# Altium PCB Zegar_PCB.PcbDoc
Units mm, origin at the board's own origin, x right, y up, seen from the top; angles counter-clockwise.
Board outline 96.52 x 64.52 mm, 2 copper layers (Top Layer, Bottom Layer), stack 1.671 mm thick; 24 components, 36 nets, 112 pads, 5 vias.
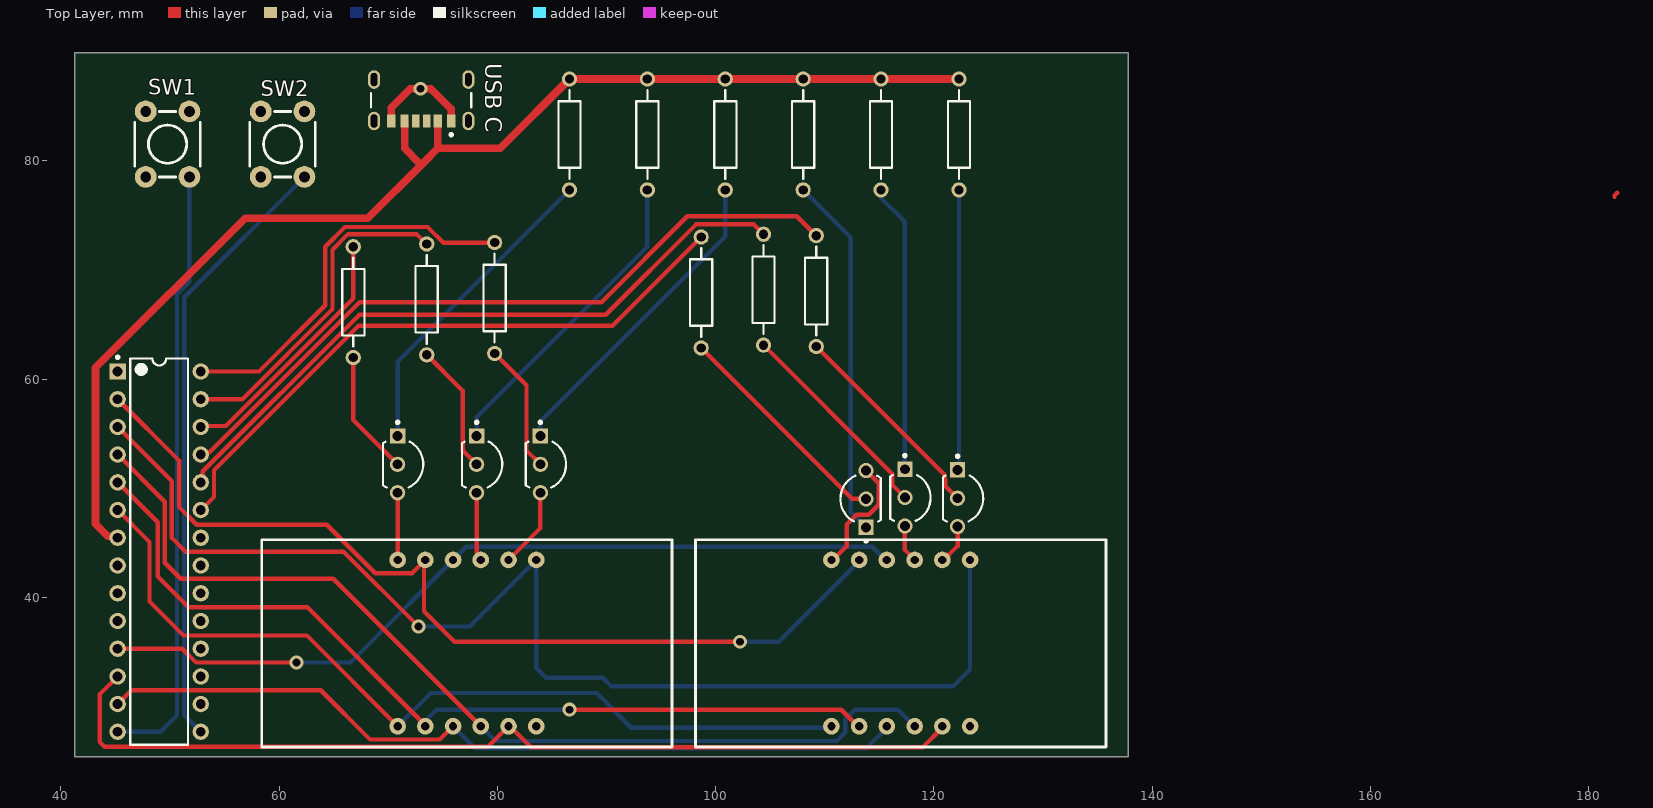
[diagram p0: Top Layer view]
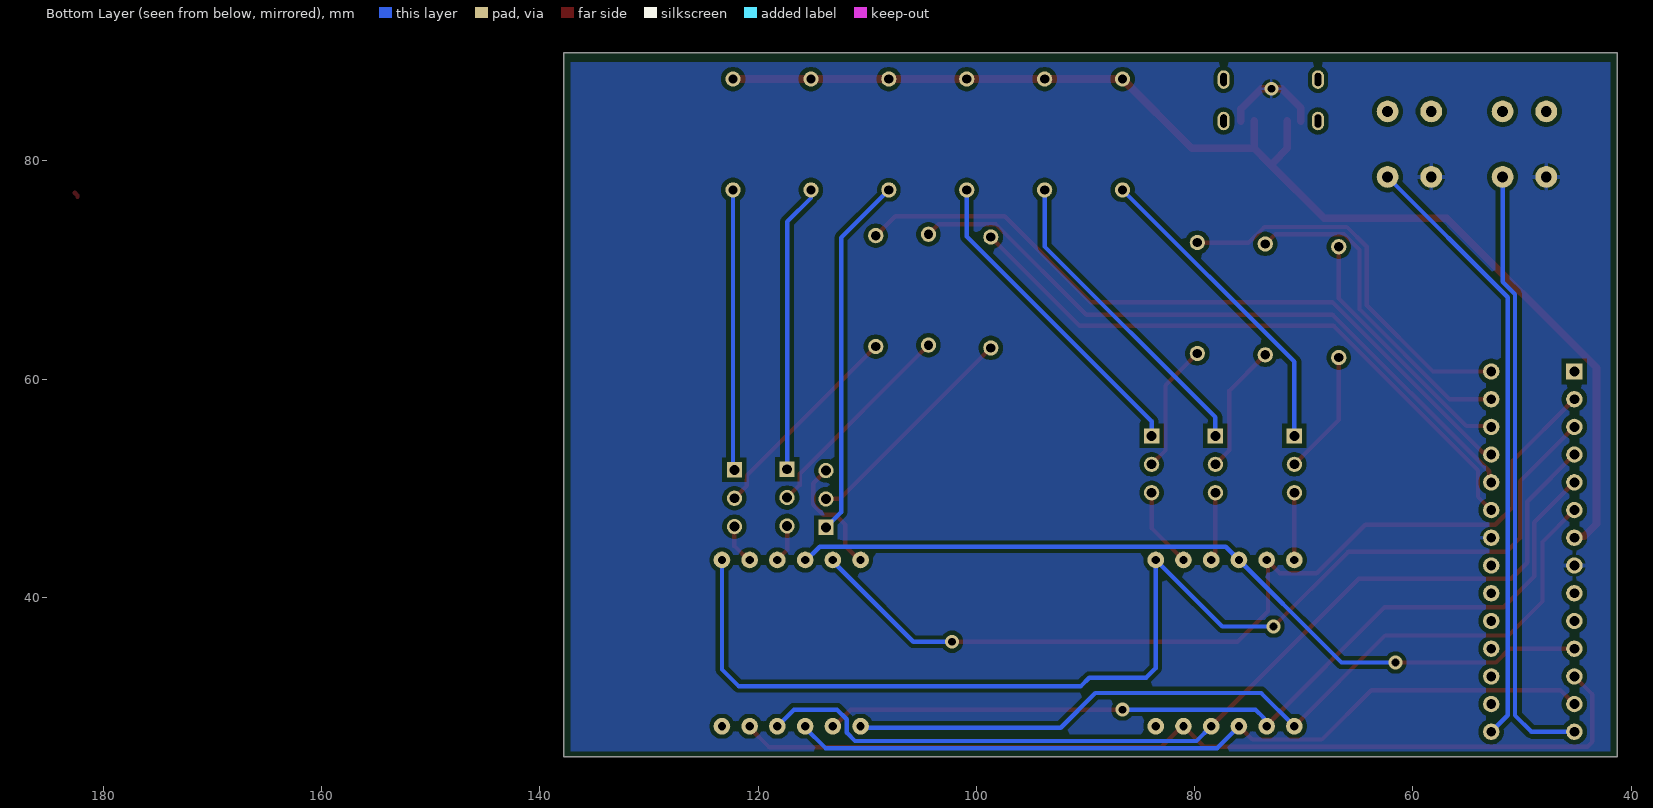
[diagram p1: Bottom Layer view, seen from below]

## Layer stack, top to bottom
Top Solder: solder mask 0.0102, Solder Resist, Dk 3.5
Top Layer: signal copper 0.0356
Dielectric 1: dielectric 1.6, FR-4, Dk 4.8
Bottom Layer: signal copper 0.0356
Bottom Solder: solder mask 0.0102, Solder Resist, Dk 3.5

## Board outline
41.275,25.4 41.275,89.916 137.795,89.916 137.795,25.4

## Design rules (kind name [scope] priority, off if disabled: settings)
Clearance [All] p1: gap=0.254 ignorepadtopadclearanceinfootprint=FALSE
PolygonConnect PolygonConnect_4 [All vs IsNamedPolygon('NONET_L-01_P-001')] p1: thpad.connectstyle=Relief thpad.reliefconductorwidth=0.4 thpad.reliefentries=4 thpad.polygonreliefangle="90 Angle" thpad.airgapwidth=0.254 smdpad.connectstyle=Relief smdpad.reliefconductorwidth=0.254 smdpad.reliefentries=4 smdpad.polygonreliefangle="90 Angle" smdpad.airgapwidth=0.254 via.connectstyle=Relief via.reliefconductorwidth=0.254 via.reliefentries=4 via.polygonreliefangle="90 Angle" via.airgapwidth=0.254
PolygonConnect PolygonConnect_3 [All vs IsNamedPolygon('NONET_L-01_P-001')] p2: thpad.connectstyle=Relief thpad.reliefconductorwidth=0.254 thpad.reliefentries=4 thpad.polygonreliefangle="90 Angle" thpad.airgapwidth=0.254 smdpad.connectstyle=Relief smdpad.reliefconductorwidth=0.254 smdpad.reliefentries=4 smdpad.polygonreliefangle="90 Angle" smdpad.airgapwidth=0.254 via.connectstyle=Relief via.reliefconductorwidth=0.4 via.reliefentries=4 via.polygonreliefangle="90 Angle" via.airgapwidth=0.4
PolygonConnect PolygonConnect_2 [All vs IsNamedPolygon('NONET_L-01_P-001')] p3: thpad.connectstyle=Relief thpad.reliefconductorwidth=0.254 thpad.reliefentries=4 thpad.polygonreliefangle="90 Angle" thpad.airgapwidth=0.254 smdpad.connectstyle=Relief smdpad.reliefconductorwidth=0.254 smdpad.reliefentries=4 smdpad.polygonreliefangle="90 Angle" smdpad.airgapwidth=0.254 via.connectstyle=Relief via.reliefconductorwidth=0.254 via.reliefentries=4 via.polygonreliefangle="90 Angle" via.airgapwidth=0.4
PolygonConnect PolygonConnect_1 [All vs IsNamedPolygon('GND_L02_P001')] p4: thpad.connectstyle=Relief thpad.reliefconductorwidth=0.254 thpad.reliefentries=4 thpad.polygonreliefangle="90 Angle" thpad.airgapwidth=0.254 smdpad.connectstyle=Relief smdpad.reliefconductorwidth=0.254 smdpad.reliefentries=4 smdpad.polygonreliefangle="90 Angle" smdpad.airgapwidth=0.254 via.connectstyle=Relief via.reliefconductorwidth=0.4 via.reliefentries=4 via.polygonreliefangle="90 Angle" via.airgapwidth=0.254
PolygonConnect [All] p5: connectstyle=Relief reliefconductorwidth=0.254 reliefentries=4 polygonreliefangle="90 Angle" airgapwidth=0.254
RoutingVias [All] p1: holewidth=0.711 width=1.27 viastyle="Through Hole" minholewidth=0.711 minwidth=1.27 maxholewidth=0.711 maxwidth=1.27
SolderMaskExpansion [All] p1: expansion=0.102 istentingtop=FALSE
SupplyNets "Schematic Supply Nets" [InNet('GND')] p1: voltage=0.000
Width [All] p1: maxlimit=1 minlimit=0.4 preferedwidth=0.4
30 further rules are at their usual default settings.

## Classes and differential pairs
component class Zegar_schemmatic: SW1 SW2 "USB C"

## Components (designator, comment, footprint, x,y, rotation, side; value= is the part's Value field where it differs from the comment)
R1 "RES_AX_1/4W_4M" AX_1/4W_4M 108.026,77.343 r90 top value=1K
R2 "RES_AX_1/4W_4M" AX_1/4W_4M 115.164,77.343 r90 top value=1K
R3 "RES_AX_1/4W_4M" AX_1/4W_4M 122.301,77.343 r90 top value=1K
R4 "RES_AX_1/4W_4M" AX_1/4W_4M 86.614,77.343 r90 top value=1K
R5 "RES_AX_1/4W_4M" AX_1/4W_4M 93.751,77.343 r90 top value=1K
R6 "RES_AX_1/4W_4M" AX_1/4W_4M 100.889,77.343 r90 top value=1K
RT1 "RES_AX_1/4W_4M" AX_1/4W_4M 98.679,62.865 r90 top value=33K
RT2 "RES_AX_1/4W_4M" AX_1/4W_4M 104.394,63.119 r90 top value=33K
RT3 "RES_AX_1/4W_4M" AX_1/4W_4M 109.22,62.992 r90 top value=33K
RT4 "RES_AX_1/4W_4M" AX_1/4W_4M 66.802,61.976 r90 top value=33K
RT5 "RES_AX_1/4W_4M" AX_1/4W_4M 73.533,62.23 r90 top value=33K
RT6 "RES_AX_1/4W_4M" AX_1/4W_4M 79.756,62.357 r90 top value=33K
SW1 "SWITCH_SQ_6m_4X6m" SQ_6m_4X6m 49.784,81.534 r0 top
SW2 "SWITCH_SQ_6m_4X6m" SQ_6m_4X6m 60.325,81.534 r0 top
T1 "BC548" TO-92W 113.792,46.422 r90 top
T2 "BC548" TO-92W 117.348,51.749 r270 top
T3 "BC548" TO-92W 122.174,51.689 r270 top
T4 "BC548" TO-92W 70.866,54.797 r270 top
T5 "BC548" TO-92W 78.105,54.797 r270 top
T6 "BC548" TO-92W 83.947,54.797 r270 top
U? "ATmega8L-8PU" 28P3 49.022,44.196 r0 top
"USB C" "USB4125-GF-A-0190" FP-USB4125-GF-A-0190-MFG 73.025,86.655 r180 top
W1 "Wyświetlacz LED" PCBComponent_1 70.866,28.194 r0 top
W2 "Wyświetlacz LED" PCBComponent_1 110.617,28.194 r0 top

## Footprints (in the part's own frame and the unit in brackets; to place one, negate y for a bottom-side part, rotate by r counter-clockwise, add the part's x,y. Pads: shape width x height; smd on the part's side, far side on the other; paste and mask are expansions set on the pad)
28P3 [mm] "28-Pin Plastic Dual In-Line Package (PDIP)"
  rect 1.5x1.5 hole 0.9: 1(-3.81,16.51)
  round 1.5 hole 0.9: 2(-3.81,13.97) 3(-3.81,11.43) 4(-3.81,8.89) 5(-3.81,6.35) 6(-3.81,3.81) 7(-3.81,1.27) 8(-3.81,-1.27) 9(-3.81,-3.81) 10(-3.81,-6.35) 11(-3.81,-8.89) 12(-3.81,-11.43) 13(-3.81,-13.97) 14(-3.81,-16.51) 15(3.81,-16.51) 16(3.81,-13.97) 17(3.81,-11.43) 18(3.81,-8.89) 19(3.81,-6.35) 20(3.81,-3.81) 21(3.81,-1.27) 22(3.81,1.27) 23(3.81,3.81) 24(3.81,6.35) 25(3.81,8.89) 26(3.81,11.43) 27(3.81,13.97) 28(3.81,16.51)
  silkscreen extent -3.93,-17.7 2.65,17.93, body extent -3.6,-17.65 3.6,17.65, height 4.58
AX_1/4W_4M [mm] "Axial Device, Thru-Hole; 2 Leads; 0.4 in Pin Spacing"
  round 1.4 hole 0.85: 1(0,0) 2(10.16,0)
  silkscreen extent 1.02,-1.02 9.14,1.02
FP-USB4125-GF-A-0190-MFG [mm]
  rrect100% 1.1x1.7 hole 1.2 slot 0.6 at 0 deg paste-2539.97 mask+0: 1(-4.32,3) 2(4.32,3) 3(-4.32,-0.8) 4(4.32,-0.8)
  rect 0.7x1.2 smd paste+0 mask+0: A5(-0.5,3) B5(0.5,3)
  rect 0.76x1.2 smd paste+0 mask+0: A9(1.52,3) B9(-1.52,3)
  rect 0.8x1.2 smd paste+0 mask+0: A12(2.75,3) B12(-2.75,3)
  silkscreen extent -4.59,0.43 4.59,4.37, body extent -4.97,-3.57 4.97,3.95, height 0.25
PCBComponent_1 [mil]
  round 60 hole 30: 1(0,0) 2(100,0) 3(200,0) 4(300,0) 5(400,0) 6(500,0) 7(500,600) 8(400,600) 9(300,600) 10(200,600) 11(100,600) 12(0,600)
  silkscreen extent -490,-75 990,673
SQ_6m_4X6m [mm]
  round 2 hole 1 paste-2539.97: 1(-2,3) 2(-2,-3) 3(2,-3) 4(2,3)
  silkscreen extent -3,-3 3,3
TO-92W [mm] "TO, 3-Leads, Body Dia 4.7mm, Pitch 2.6mm"
  rect 1.4x1.4 hole 0.9: 1(0,0)
  round 1.4 hole 0.9: 2(2.6,0) 3(5.2,0)
  silkscreen extent -1.37,-1.34 4.73,2.35, body extent -0.24,-1.34 5.44,2.35, height 5.33

## Part data
R1 R2 R3 R4 R5 R6 RT1 RT2 RT3 RT4 RT5 RT6: "Resistor", LatestRevisionDate=17-Jul-2002, LatestRevisionNote="Re-released for DXP Platform.", PackageDescription="Axial Device, Thru-Hole; 2 Leads; 0.4 in Pin Spacing", PackageReference=AXIAL-0.4, Published=8-Jun-2000, Publisher="Altium Limited"
SW1 SW2: Contact Current Rating=50mA, Voltage Rating=12V, Actuator Length=1.5mm, Current Rating=50mA, Height=4mm, Mount="Through Hole", Switch Function=Off-Mom
T1 T2 T3 T4 T5 T6: "Amplifier Transistor, NPN Silicon, 3-Pin TO-92, Bulk Box", Manufacturer="On Semiconductor", PartNumber=BC548B, ComponentLink1Description="Manufacturer URL", ComponentLink1URL=http://www.onsemi.com/, ComponentLink2Description=Datasheet, ComponentLink2URL=http://www.onsemi.com/pub_link/Collateral/BC546-D.PDF, ComponentLink3Description="Package Specification", ComponentLink3URL=http://www.onsemi.cn/pub_link/Collateral/2N6426-D.PDF, DatasheetVersion="Rev. 7", fT Min (MHz)=150, IC Continuous (A)=0.1, Mounting Technology="Through Hole", PackageDescription="3-Pin Transistor Outline, Body 4.825 x 3.685 mm, Pitch 1.27 mm", PackageReference=TO-92-3-29-11_AM_SL, PackageVersion="Rev. AM", Packing="Bulk Box", Polarity=NPN, RoHS=FALSE
U?: library part CMP-0095-00374-1, "8-bit AVR Microcontroller, 2.7-5.5V, 8MHz, 8KB Flash, 512 Bytes EEPROM, 1KB SRAM, 28-pin PDIP, Industrial Grade (-40°C to 85°C)", ComponentLink1Description="Manufacturer URL", ComponentLink1URL=http://www.atmel.com/, ComponentLink2Description=ATmega8(L), ComponentLink2URL=http://www.atmel.com/dyn/resources/prod_documents/doc2486.pdf, ComponentLink3Description="ATmega8(L) Summary", ComponentLink3URL=http://www.atmel.com/dyn/resources/prod_documents/2486S.pdf, DatasheetVersion="revZ, Feb-2011", PackageDescription="28-lead (0.300\"/7.62mm Wide) Plastic Dual Inline Package (PDIP)", PackageReference=28P3, PackageVersion="revB, Sep-2001"
"USB C": library part CMP-245163-000004-1, "CONN RCPT TYPE C 6P SMD RA"

## Via types
v1: diameter 1.27, hole 0.711, Top Layer to Bottom Layer, 5 vias

## Nets (pads, with @x,y where several pads share a name; then routed paths per layer and width w, separated by ;. In a path a pad name is that pad's centre, name@x,y a point inside that pad or via, vN(x,y) a via of type N, cw(c..) or ccw(c..) an arc to the next point about the centre after c; other vN are vias at no path point)
GND: "USB C.A12" "USB C.B12" SW1.2 SW2.2 U?.8 U?.22 | length 9.4
  Top Layer w0.7: 70.275,83.655 70.275,84.855 72.034,86.614 73.914,86.614 75.775,84.753 75.775,83.655
  Bottom Layer w0.4: U?.8 U?.8@45.339,42.926
  other v1: 72.974,86.614
NetR1_1: R1.1 T1.1 | length 33.3
  Bottom Layer w0.4: R1.1 112.395,72.974 112.395,47.819 T1.1
NetR2_1: R2.1 T2.1 | length 26.5
  Bottom Layer w0.4: R2.1 115.164,76.606 117.348,74.422 T2.1
NetR3_1: R3.1 T3.1 | length 25.7
  Bottom Layer w0.4: T3.1@122.301,51.689 R3.1
NetR4_1: R4.1 T4.1 | length 29.1
  Bottom Layer w0.4: T4.1 70.866,61.595 R4.1
NetR5_1: R5.1 T5.1 | length 29
  Bottom Layer w0.4: T5.1 78.105,56.515 93.751,72.161 R5.1
NetR6_1: R6.1 T6.1 | length 29.6
  Bottom Layer w0.4: T6.1 83.947,56.134 100.889,73.076 R6.1
NetRT1_2: RT1.2 U?.23 | length 57.6
  Top Layer w0.4: U?.23 54.036,49.21 54.036,51.662 67.271,64.897 90.551,64.897 RT1.2
NetRT2_2: RT2.2 U?.24 | length 62.6
  Top Layer w0.4: U?.24 53.006,50.72 53.006,51.557 67.362,65.913 89.935,65.913 98.201,74.179 103.494,74.179 RT2.2
  Bottom Layer w0.4: U?.24 U?.24@53.086,50.8
NetRT3_2: RT3.2 U?.25 | length 66.2
  Top Layer w0.4: U?.25 53.042,53.296 53.622,53.296 67.382,67.056 89.535,67.056 97.409,74.93 107.442,74.93 RT3.2
NetRT4_2: RT4.2 U?.26 | length 23.6
  Top Layer w0.4: U?.26 52.912,55.706 55.107,55.706 66.802,67.401 RT4.2
NetRT5_2: RT5.2 U?.27 | length 30.5
  Top Layer w0.4: U?.27 56.642,58.166 64.897,66.421 64.897,71.863 66.324,73.29 72.595,73.29 73.495,72.39 RT5.2
NetRT6_2: RT6.2 U?.28 | length 36.1
  Top Layer w0.4: U?.28 58.166,60.706 64.243,66.783 64.243,72.134 66.053,73.944 73.611,73.944 75.038,72.517 RT6.2
NetSW1_3: SW1.3 U?.14 | length 55.9
  Bottom Layer w0.4: U?.14 49.149,27.686 50.654,29.191 50.654,67.788 51.784,68.918 SW1.3@51.784,78.531
NetSW2_3: SW2.3 U?.15 | length 56
  Bottom Layer w0.4: U?.15 51.308,29.21 51.308,67.517 SW2.3
NetU?_2: U?.2 W1.11 W2.11 | length 86.4
  Top Layer w0.4: U?.2 50.84,52.538 50.84,48.295 52.465,46.67 64.364,46.67 68.816,42.218 72.19,42.218 W1.11@73.279,43.307 ; W1.11 W1.11@73.279,43.307 ; v1(102.235,35.941) 76.073,35.941 73.279,38.735 W1.11@73.279,43.307
  Bottom Layer w0.4: v1(102.235,35.941) 105.791,35.941 W2.11@113.157,43.307
NetU?_3: U?.3 W1.7 W2.7 | length 112.6
  Top Layer w0.4: U?.3 50.186,50.652 50.186,45.445 51.435,44.196 65.913,44.196 v1(72.771,37.338)
  Bottom Layer w0.4: U?.3@45.085,55.499 U?.3 ; v1(72.771,37.338) 77.47,37.338 W1.7 83.566,33.528 84.455,32.639 89.662,32.639 90.424,31.877 121.793,31.877 123.317,33.401 W2.7@123.317,43.307
NetU?_4: U?.4 W1.4 W2.4 | length 89.7
  Top Layer w0.4: U?.4 49.532,48.766 49.532,43.178 50.988,41.722 64.958,41.722 W1.4
  Bottom Layer w0.4: W1.4 79.829,26.851 111.121,26.851 111.887,27.617 111.887,28.829 112.776,29.718 116.713,29.718 W2.4
NetU?_5: U?.5 W1.2 W2.2 | length 80.9
  Top Layer w0.4: U?.5 48.878,46.88 48.878,41.927 51.689,39.116 62.589,39.116 73.406,28.299 W1.2 ; v1(86.614,29.718) 111.506,29.718 W2.2@113.157,28.067
  Bottom Layer w0.4: 73.66,28.956 74.422,29.718 v1(86.614,29.718)
NetU?_6: U?.6 W1.1 W2.1 | length 79.4
  Top Layer w0.4: U?.6 48.133,45.085 48.133,39.624 51.247,36.51 62.55,36.51 W1.1
  Bottom Layer w0.4: W1.1 73.914,31.242 89.104,31.242 92.279,28.067 W2.1@110.617,28.067
NetU?_11: U?.11 W1.10 W2.10 | length 76.3
  Top Layer w0.4: U?.11 51.129,35.306 52.399,34.036 v1(61.595,34.036)
  Bottom Layer w0.4: U?.11 U?.11@45.51,35.306 ; v1(61.595,34.036) 66.548,34.036 77.162,44.65 114.354,44.65 W2.10@115.697,43.307
NetU?_12: U?.12 W1.5 W2.5 | length 85.5
  Top Layer w0.4: U?.12 43.561,31.115 43.561,26.777 44.014,26.324 79.156,26.324 W1.5 ; 81.661,27.686 83.058,26.289 118.999,26.289 W2.5@120.777,28.067
NetU?_13: U?.13 W1.3 W2.3 | length 75
  Top Layer w0.4: U?.13 46.482,31.496 63.824,31.496 68.342,26.978 74.73,26.978 W1.3
  Bottom Layer w0.4: W1.3 77.943,26.197 113.827,26.197 W2.3@115.697,28.067
T1: RT1.1 T1.2 | length 20.8
  Top Layer w0.4: RT1.1 112.492,49.052 113.762,49.052 T1.2
T2: RT2.1 T2.2 | length 19.3
  Top Layer w0.4: RT2.1 116.194,51.319 116.194,50.861 116.205,50.85 116.205,50.292 T2.2
T3: RT3.1 T3.2 | length 19.3
  Top Layer w0.4: RT3.1 121.02,51.192 121.02,50.801 121.031,50.79 121.031,50.232 T3.2
T4: RT4.1 T4.2 | length 11.5
  Top Layer w0.4: RT4.1 66.802,56.261 T4.2
T5: RT5.1 T5.2 | length 11.9
  Top Layer w0.4: RT5.1 76.835,58.928 76.835,53.467 T5.2
T6: RT6.1 T6.2 | length 11.9
  Top Layer w0.4: RT6.1 82.677,59.436 82.677,53.467 T6.2
VCC: "USB C.A9" "USB C.B9" R1.2 R2.2 R3.2 R4.2 R5.2 R6.2 U?.7 | length 114.2
  Top Layer w0.7: U?.7 45.059,45.619 44.317,45.619 43.18,46.756 43.18,61.028 56.9,74.748 68.144,74.748 73.191,79.795 ; 71.505,83.655 71.505,81.149 72.859,79.795 73.191,79.795 ; 74.545,83.655 74.545,81.149 ; R3.2 R2.2 R1.2 R6.2 R5.2 R4.2 80.26,81.149 74.545,81.149 ; 73.191,79.795 74.545,81.149
W1_8: T3.3 W2.8 | length 3.8
  Top Layer w0.4: W2.8@120.777,43.307 122.174,44.704 T3.3
W1_9: T2.3 W2.9 | length 3.6
  Top Layer w0.4: T2.3 117.348,44.344 118.237,43.455 W2.9@118.237,43.307
W1_12: T1.3 W2.12 | length 11.2
  Top Layer w0.4: W2.12@110.617,43.307 112.014,44.704 112.014,46.686 112.916,47.588 114.044,47.588 114.946,48.489 114.946,50.468 T1.3
W2_8: T6.3 W1.8 | length 7.4
  Top Layer w0.4: W1.8 83.947,46.355 T6.3
W2_9: T5.3 W1.9 | length 6.3
  Top Layer w0.4: T5.3 78.105,44.119 78.486,43.738 W1.9
W2_12: T4.3 W1.12 | length 6.2
  Top Layer w0.4: W1.12 T4.3
pads on no net: "USB C.1" "USB C.2" "USB C.3" "USB C.4" "USB C.A5" "USB C.B5" SW1.1 SW1.4 SW2.1 SW2.4 U?.1 U?.9 U?.10 U?.16 U?.17 U?.18 U?.19 U?.20 U?.21 W1.6 W2.6
copper on no net: | length 0.5
  Top Layer w0.4: 182.372,76.708 182.372,76.835 182.626,77.089

## Polygon pours and split planes (outlines as drawn)
GND on Bottom Layer "NONET_L-01_P-001" (solid, pour order 0): 41.91,25.908 42.164,25.908 137.16,25.908 137.16,89.027 135.89,89.027 41.91,89.027

## Silkscreen, mask and mechanical layers (free items; w line width, h text height)
Mechanical 1:
  the board outline again, w0.254